# Altium PCB Kanaloa_v2.0.0_Power.PcbDoc (part 2 of 2)
Units mil, origin at the board's own origin, x right, y up, seen from the top; angles counter-clockwise.
Board outline 5000 x 6000 mil, 4 copper layers (Top Layer, GND, +24V, Bottom Layer), stack 62 mil thick; 146 components, 108 nets, 614 pads, 645 vias.
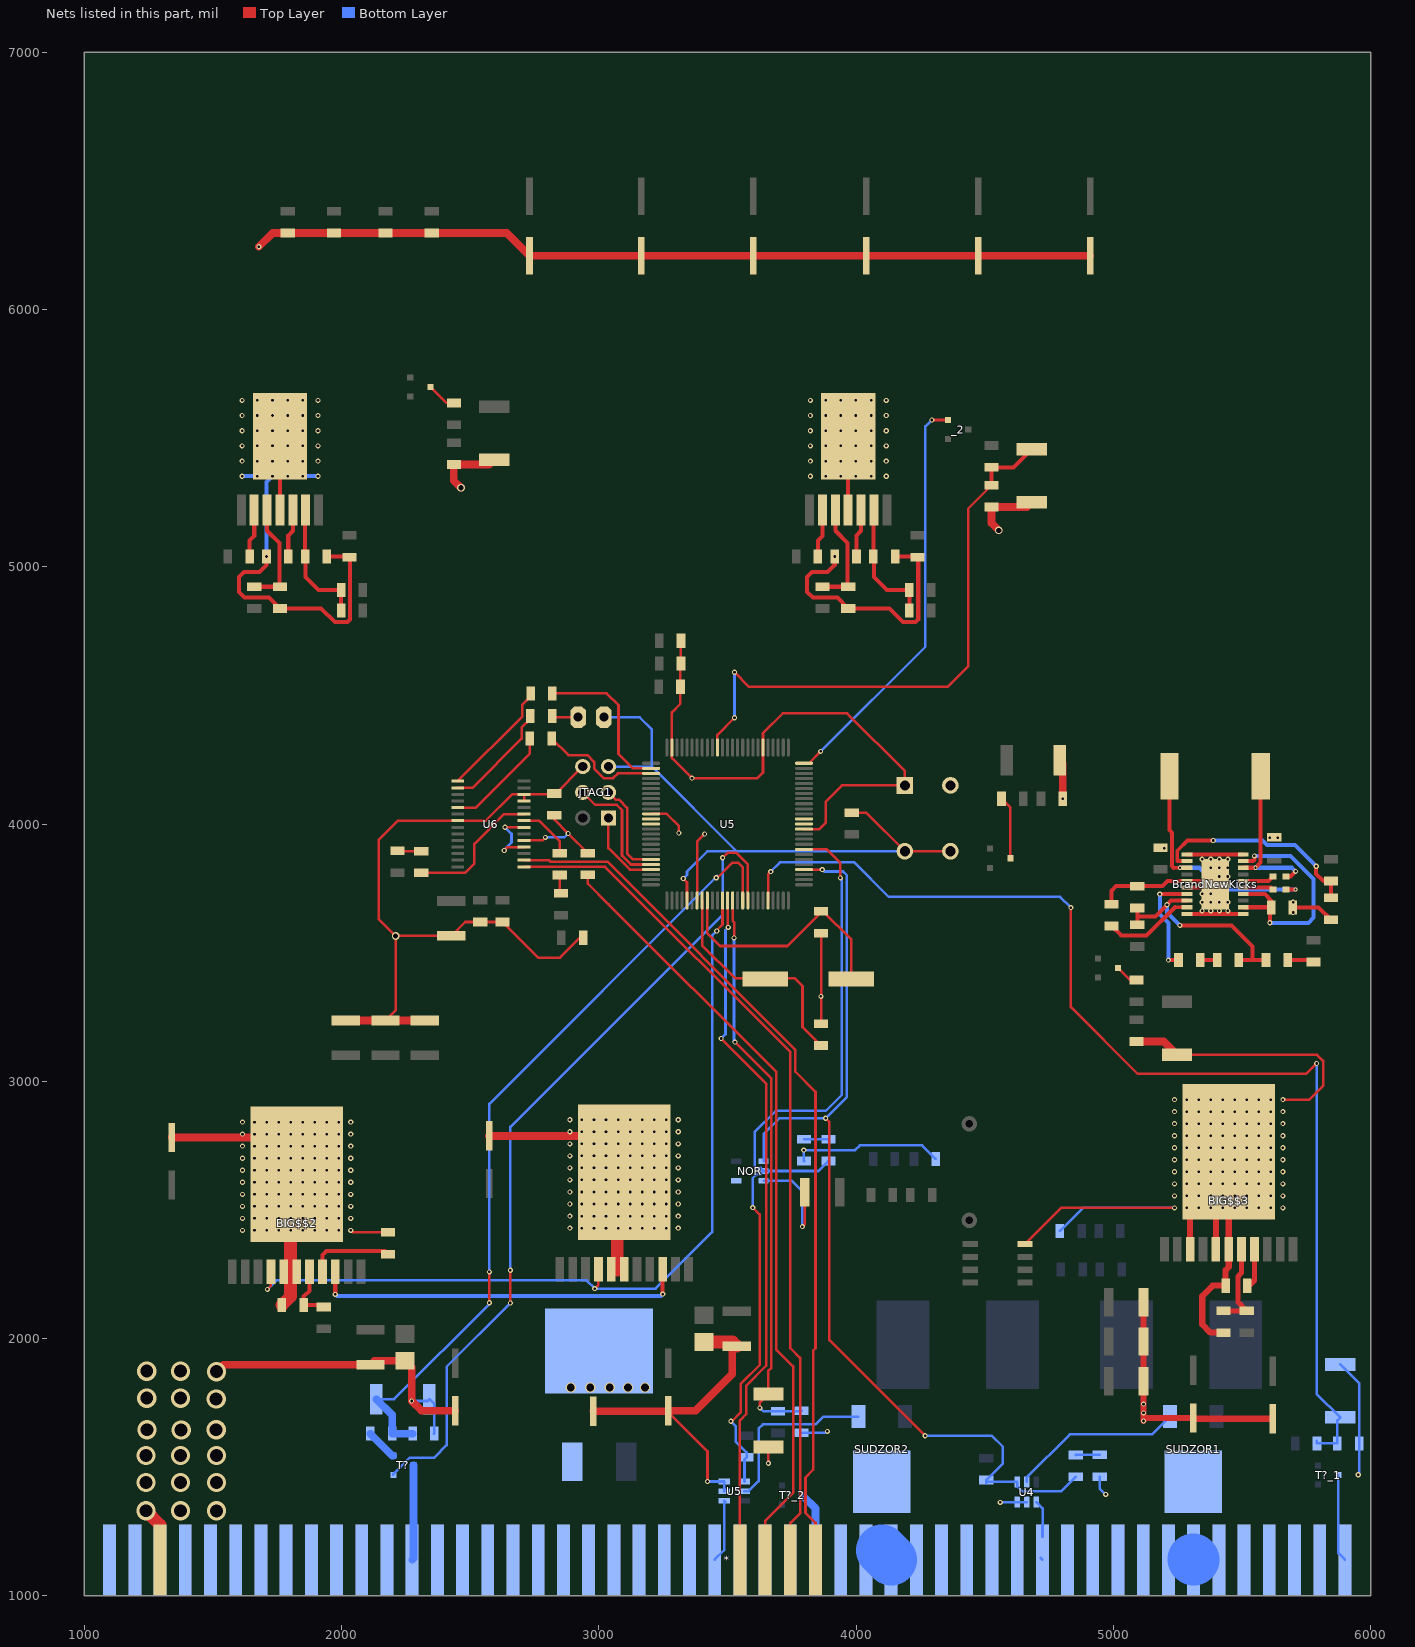
[diagram p4: the nets of this part, all layers, seen from the top]

## Via types
v1: diameter 20, hole 10, Top Layer to Bottom Layer, 535 vias
v2: diameter 75, hole 50, Top Layer to Bottom Layer, 89 vias
v3: diameter 30, hole 20, Top Layer to Bottom Layer, 6 vias
v4: diameter 40, hole 30, Top Layer to Bottom Layer, 5 vias
v5: diameter 22, hole 10, Top Layer to Bottom Layer, 3 vias
v6: diameter 80, hole 60, Top Layer to Bottom Layer, 3 vias
v7: diameter 15.75, hole 7.87, Top Layer to Bottom Layer, 3 vias
v8: diameter 10, hole 10, Top Layer to Bottom Layer, 1 vias

## Nets (pads, with @x,y where several pads share a name; then routed paths per layer and width w, separated by ;. In a path a pad name is that pad's centre, name@x,y a point inside that pad or via, vN(x,y) a via of type N, cw(c..) or ccw(c..) an arc to the next point about the centre after c; other vN are vias at no path point) (continued)
battery1monitor: _1_1.1 U5.46 Z2_1_1.N | length 4447.3
  Top Layer w10: U5.46@3657.48,3702.76 3657.48,3804.48 v1(3668,3815) ; v1(4835,3675) 4835,3288 5094.72,3028.28 5749.28,3028.28 v1(5790,3069)
  Bottom Layer w10: v1(3668,3815) 3704,3851 3992.72,3851 4126.72,3717 4793,3717 v1(4835,3675) ; v1(5790,3069) 5790,1785 Z2_1_1.N@5882,1693 5870.68,1681.68 _1_1.1@5870.68,1592 _1_1.1@5791.32,1592 _1_1.1@5791.32,1602.32
battery2monitor: _1_2.2 _1_3.2 U5.39 Z2_1_2.N | length 2221.7
  Top Layer w10: U5.39@3519.68,3702.76 3519.68,3624.32 3526,3618 3526,3558 v1(3525,3557) ; v1(3529,3152) 3670,3011 3670,1885.72 3659,1874.72 Z2_1_2.N@3659,1784 3626,1751 v1(3626,1730)
  Bottom Layer w10: v1(3525,3557) 3525,3156 v1(3529,3152) ; v1(3626,1730) 3638.68,1717.32 _1_3.2@3696,1717.32 3787,1717.32 _1_2.2@3788,1718.32
"BATTERY 1": *.88 *.89 *.90 *.91 *.92 *.93 *.94 *.95 *.96 *.97 *.98 *.99 *.100 SUDZOR1.D T?_1.C U4.1 | length 539.8
  Bottom Layer w10: U4.1@4700.4,1363.63 4725,1339.03 4725,1230 4724,1229 *.88@4724,1272.06 ; *.88@4717.52,1146.48 *.88@4724,1140 ; T?_1.C@5874.37,1469 5874.37,1165.63 *.100@5900,1140
  Bottom Layer w200: *.94@5310.04,1141.96 *.94@5312,1140
"BATTERY 1 STATUS": Bat1Stat.2 NOR.13 R9.1@4505.91,1449.8 U4.4 U5.54 | length 3809.1
  Top Layer w10: U5.54@3797.24,3822.83 v1(3868.11,3822.83) ; v1(3881,2856) 3896,2841 3896,1994 v1(4268,1622)
  Bottom Layer w10: NOR.13@3640.15,2688.4 3640.15,2795.15 3701,2856 v1(3881,2856) 3963.98,2938.98 3963.98,3800.71 3949.33,3815.35 3875.59,3815.35 v1(3868.11,3822.83) ; v1(4268,1622) 4527,1622 4570,1579 4570,1513.9 R9.1@4505.91,1449.8 ; R9.1@4505.91,1437.01 R9.1@4505.91,1449.8 ; Bat1Stat.2@4853.35,1462.23 4796.83,1405.72 4645.96,1405.72 4625.6,1426.08 U4.4@4625.6,1442.37 4513.34,1442.37 R9.1@4505.91,1449.8
"BATTERY 2": *.75 *.76 *.77 *.78 *.79 *.80 *.81 *.82 *.83 *.84 *.85 *.86 *.87 SUDZOR2.D T?_2.C U5.1@3487.2,1369.09 | length 575.5
  Bottom Layer w10: *.75@3450,1140 3487.2,1177.2 U5.1@3487.2,1369.09 U5.1@3492.03,1364.27
  Bottom Layer w30: T?_2.C@3790.37,1391 3842,1339.37 *.79@3842,1140
  Bottom Layer w200: 4099.41,1176.59 *.82@4136,1140
"BATTERY 2 STATUS": Bat2Stat.2 NOR.12 R10.1 U5.4@3565.94,1443.9 U5.58 | length 3229.5
  Top Layer w10: v1(3513,1678) 3516.36,1678 3552,1713.64 3552,1824.29 3625.55,1897.84 3625.55,2139.02 3625,2139.57 3625,2482 v1(3598,2509) ; U5.58@3797.24,3901.57 3885.83,3901.57 3938.98,3848.43 v1(3938.98,3790.35)
  Bottom Layer w10: v1(3513,1678) 3531.44,1659.56 3531.44,1599.38 3574,1556.82 R10.1@3574,1537.68 3565.94,1529.62 U5.4@3565.94,1443.9 ; v1(3598,2509) 3598,2623.17 3614.25,2639.43 3628.57,2639.43 NOR.12@3640.15,2651 ; Bat2Stat.2@3891.97,2689.94 3853.03,2651 NOR.12@3640.15,2651 ; v1(3938.98,3790.35) 3943.98,3785.35 3943.98,2947.26 3881.72,2885 3687.46,2885 3605.46,2803 3605.46,2671.36 3614.25,2662.57 3628.57,2662.57 NOR.12@3640.15,2651
BST1: .1uF.2@5619.95,3795.92 BrandNewKicks.16 | length 122.3
  Top Layer w15.75: BrandNewKicks.16@5504.8,3778.72 5602.75,3778.72 .1uF.2@5619.95,3795.92
BST2: .1uF.2@5619.95,3745.92 BrandNewKicks.15 | length 118.1
  Top Layer w15.75: BrandNewKicks.15@5504.8,3753.13 5612.75,3753.13 .1uF.2@5619.95,3745.92
Collector_12: ?.1@2436.02,5636.81 ?.C@2345.37,5699 | length 116.4
  Top Layer w10: ?.C@2345.37,5699 2407.56,5636.81 ?.1@2436.02,5636.81
Collector_24Reg: ?.2@5089.83,3393.68 ?.C@5018.37,3440 | length 90.7
  Top Layer w10: ?.C@5018.37,3440 5064.69,3393.68 ?.2@5089.83,3393.68
Collector_24V: ?.2@4564.98,4098.31 ?.C@4599.37,3867 | length 245.6
  Top Layer w10: ?.2@4564.98,4098.31 4599.37,4063.93 ?.C@4599.37,3867
collector_disp: 
disp_sel: _2.B U5.75 | length 1613.6
  Top Layer w10: U5.75@3797.24,4236.22 3816.22,4236.22 v1(3862,4282) ; v1(4294.37,5570.6) _2.B@4356.6,5570.6
  Bottom Layer w10: v1(3862,4282) 4269,4689 4269,5545.23 v1(4294.37,5570.6)
dispmon: _2.1@4526.39,5316.88 _2.2@4526.39,5386.76 U5.90 Z3_1.N | length 2282.3
  Top Layer w10: U5.90@3460.63,4297.24 3460.63,4346.63 v1(3527,4413) ; v1(3527,4590) 3584,4533 4355,4533 4435,4613 4435,5225.49 _2.1@4526.39,5316.88
  Top Layer w15.75: _2.1@4526.39,5316.88 _2.2@4526.39,5386.76 4612.37,5386.76 Z3_1.N@4682.89,5457.28
  Bottom Layer w10: v1(3527,4413) v1(3527,4590)
EN12: ENB.2 ENT.1 pad.2@1710,5220 | length 418.4
  Top Layer w15.75: ENT.1@1660,4922.32 ENB.2@1760,4922.32 1757.72,4924.61 1757.72,5092.28 1710,5140 pad.2@1710,5220
EN12_disp: ENB_1.2 ENT_1.1 pad.2@3919,5220 | length 415.2
  Top Layer w15.75: ENT_1.1@3869,4922.32 ENB_1.2@3969,4922.32 ; pad.2@3919,5220 3919,5140 3966.72,5092.28 ENB_1.2@3966.72,4924.61
Enable: BIG$$2.3 pad.3@2997.95,2268.86 U5.37 | length 3308.5
  Top Layer w10: v1(1711,2191) 1725,2205 BIG$$2.3@1725,2259.72 ; v1(2984,2194) 2997.95,2207.95 pad.3@2997.95,2268.86 ; v1(3458,3584) 3458,3587 3480.32,3609.32 U5.37@3480.32,3702.76
  Bottom Layer w10: v1(1711,2191) 1746,2226 2952,2226 v1(2984,2194) 3220,2194 3440,2414 3440,3566 v1(3458,3584)
"EXT. PWR": *.62 *.63 *.64 *.65 *.66 *.67 *.68 *.69 *.70 *.71 *.72 *.73 *.74 ?.2@2896,1521 T?.C | length 369.2
  Bottom Layer w30: *.63@2274,1140 2279.37,1145.37 T?.C@2279.37,1507
"EXT. PWR. STATUS": NOR.11
externalPowerVoltageMon: _1.1 U5.41 Z2_1.N | length 3125.9
  Top Layer w10: v1(2574,2139) v1(2574,2259) ; v1(3456,3791) 3460.64,3791 3519.64,3850 3540.36,3850 3559.37,3830.99 3559.37,3780.94 ; U5.41@3559.06,3702.76 3559.06,3780.94
  Bottom Layer w10: Z2_1.N@2135,1764 2204,1764 2574,2134 v1(2574,2139) ; v1(2574,2259) 2574,2912 v1@3460,3798
  Bottom Layer w30: Z2_1.N@2135,1764 2196.32,1702.68 _1.1@2196.32,1630 _1.1@2275.68,1630
extpower_emit: _1.2@2111.68,1630 T?.E | length 124.4
  Bottom Layer w30: _1.2@2111.68,1630 2197.28,1544.4 T?.E@2200.63,1544.4
ExtpwrVoltageSel: T?.B U5.42 | length 3250.3
  Top Layer w10: v1(2656,2138) v1(2656,2265) ; v1(3481,3869) 3500,3888 3534,3888 3578.74,3843.26 U5.42@3578.74,3702.76
  Bottom Layer w10: T?.B@2200.63,1469.6 2200.63,1473.1 2264.53,1537 2360,1537 2408,1585 2408,1890 v1(2656,2138) ; v1(2656,2265) 2656,2822 3481,3647 v1(3481,3869)
FB: 1M.1 10k.2@5593.22,3470.69 43.2k.2 3300pF.1 BrandNewKicks.8 | length 859.3
  Top Layer w15: 5224.4,3701.94 BrandNewKicks.8@5286.29,3701.94
  Top Layer w15.75: 1M.1@5092.94,3608.24 5092.94,3640.92 ; 43.2k.2@5092.94,3673.6 5092.94,3640.92 ; 5224.4,3701.94 v1(5208.38,3685.92) 5163.38,3640.92 5092.94,3640.92 ; v1(5258.38,3605.92) 5458.38,3605.92 5540.54,3523.76 5540.54,3470.69 ; 3300pF.1@5487.87,3470.69 5540.54,3470.69 ; 10k.2@5593.22,3470.69 5540.54,3470.69
  Bottom Layer w15.75: v1(5208.38,3685.92) 5208.38,3655.92 v1(5258.38,3605.92)
FB3: BIG$$3.6 RFBB.2@5428.41,2107.54 RFBT.1@5518.41,2107.54 | length 349.8
  Top Layer w19.68: RFBB.2@5428.41,2107.54 RFBT.1@5518.41,2107.54 5484.16,2141.79 5484.16,2240.99 5498.41,2255.25 BIG$$3.6@5498.41,2347.26
FB5: BIG$$2.6 RFBB.1@1852.32,2130 RFBT.2@1930,2122.32 | length 220
  Top Layer w15.75: BIG$$2.6@1875,2259.72 1875,2185 1852.32,2162.32 RFBB.1@1852.32,2130 1922.32,2130 RFBT.2@1930,2122.32
FB12: CFF.2 pad.5@1860,5220 RFBB12.1 RFBT12.2 | length 500.3
  Top Layer w15.75: pad.5@1860,5220 1857.68,5217.68 RFBB12.1@1857.68,5040 1860,5037.68 1860,4960 1910,4910 CFF.2@1997.68,4910 RFBT12.2@1997.68,4830
FB12_disp: CFF_1.2 pad.5@4069,5220 RFBB12_1.1 RFBT12_1.2 | length 493.7
  Top Layer w15.75: RFBB12_1.1@4066.68,5040 pad.5@4066.68,5217.68 ; RFBB12_1.1@4069,5037.68 4069,4960 4119,4910 CFF_1.2@4206.68,4910 RFBT12_1.2@4206.68,4830
ff: 10k.1@5677.87,3470.69 22pF.1 | length 103.4
  Top Layer w15.75: 10k.1@5677.87,3470.69 5771.29,3470.69 22pF.1@5778.38,3463.6
Gate1: SUDZOR1.G U4.5 | length 671.3
  Bottom Layer w10: U4.5@4663,1442.37 4663,1458.66 4831.34,1627 5149.99,1627 SUDZOR1.G@5219.49,1696.5
Gate2: SUDZOR2.G U5.5@3565.94,1406.5 | length 682.6
  Bottom Layer w10: U5.5@3565.94,1406.5 3582.24,1406.5 3621,1445.26 3621,1649.44 3637.56,1666 3841.74,1666 3872.24,1696.5 SUDZOR2.G@4008.86,1696.5
GND: 4.7uF.2 10uF.1@5625.54,3948.24 10uF.2@5182.94,3908.24 35.7K.1 43.2k.1 130k.2 *.3 *.51 *.52 *.53 *.54 *.55 *.56 *.57 *.58 *.59 *.60 *.61 ?.1@4189.42,4149.95 ?.1@4803.17,4098.31 ?.2@2436.02,5397.64 ?.2@5089.83,3154.5 ?.3@4366.58,4149.95 ?.4@4656.3,2367 ?.GND _1.2@2360.32,1630 _1_1.2@5955.32,1592 _1_2.1 _2.2@4526.39,5232.24 BIG$$2.4 BIG$$2.5 BIG$$2.11 BIG$$3.2 BIG$$3.4 BIG$$3.5 BIG$$3.11 BrandNewKicks.1 BrandNewKicks.5 BrandNewKicks.6 BrandNewKicks.10 BrandNewKicks.11 BrandNewKicks.20 BrandNewKicks.21 C1.1 C2.1 C3.1 C5.2 C6.1 C7.1 C8.1 C9.1 C10.1 C17.N C18.N C19.N C20.N C21.N C22.N C23.2 C24.2 C25.2 C26.2 CinB1.2 CinB1_1.1 CinB2.2 CinB2_1.1 CinB3.2 CinB3_1.1 CinMByp.N CinSlByp.N Cout.2 Cout_1.2 CoutB1.N CoutB1_1.N CoutB2.N CoutB2_1.N CoutB3.N CoutMByp1.1 CoutMByp2.1 CoutPwrP.2 CoutSlByp1.1 CoutSlByp2.1 CSS12.2 CSS12_1.2 CSS.1 ENB.1 ENB_1.1 JTAG1.6 NOR.14 pad.3@1760,5220 pad.3@3969,5220 pad.4@3047.95,2268.86 pad.5@3097.95,2268.86 pad.7@1760,5507.6 pad.7@3969,5507.6 pad.11 R8.1 R11.2 R12.2 R14.2 R14_1.2 RFBB12.2 RFBB12_1.2 RFBB.1@5428.41,2022.89 RFBB.2@1767.68,2130 U4.2 U4.3 U5.2@3487.2,1406.5 U5.3@3487.2,1443.9 U5.11 U5.32 U5.62 U5.81 U5.99 U6.7 U6.18 U6.21 U6.25 U6.26 Z1.P Z2.P Z2_1.P Z2_1_1.P Z2_1_2.P Z3.P Z3_1.P | length 25800.2
  Top Layer w10: v1(2035.47,2419.95) 2043.09,2412.32 CSS.1@2180,2412.32 ; CinB2.2@2170.28,3236.22 2209.65,3275.59 v3(2209.65,3564.96) ; v1(2632,3897) 2645.43,3910.43 U6.18@2708.94,3910.43 ; v1(2634.8,3987.2) U6.21@2708.94,3987.2 ; U6.25@2708.94,4089.57 U6.26@2708.94,4115.16 ; JTAG1.6@2937.01,4223.03 2829.13,4115.16 U6.26@2708.94,4115.16 ; C5.2@2938.23,3570 2848.54,3480.32 2763.78,3480.32 C7.1@2625,3619.09 C9.1@2538.39,3619.09 2480.32,3619.09 C10.1@2426.18,3564.96 v3(2209.65,3564.96) ; U5.11@3202.76,4039.37 3263.63,4039.37 3311,3992 v1(3311,3965) ; CoutB3.N@3266.73,1716.54 3422.1,1561.17 v1(3422.1,1443.9) ; C1.1@3318.9,4712.6 C2.1@3318.9,4624.02 3316.93,4622.05 C3.1@3316.93,4533.46 3316.93,4467.52 3283.46,4434.06 U5.99@3283.46,4297.24 3283.46,4256.63 v1(3361.95,4178.15) 3616.14,4178.15 3637.8,4199.8 U5.81@3637.8,4297.24 3637.8,4353.35 3714.57,4430.12 3964.57,4430.12 4189.42,4205.27 ?.1@4189.42,4149.95 3944.95,4149.95 3882,4087 3882,4005.32 3857,3980.32 U5.62@3797.24,3980.32 ; U5.32@3381.89,3702.76 3381.89,3931.89 v1(3411,3961) ; v1(3659,1515) Z2_1_2.P@3659,1578 ; v1(3791,2435) 3800.09,2444.09 CoutPwrP.2@3800.09,2568 ; C6.1@3863.47,3223.39 C8.1@3863.47,3575.76 ; ?.4@4656.3,2367 4796.78,2507.49 v1(5237.68,2507.49) ; Z1.P@5247.31,3102.68 5791.67,3102.68 5815,3079.36 5815,2982 5761.69,2928.69 v1(5658.88,2928.69) ; v3(2209.65,3564.96) 2143.7,3630.91 2143.7,3937.99 2218.5,4012.8 U6.7@2451.06,4012.8 2560.04,4012.8 2662.4,4115.16 U6.26@2708.94,4115.16
  Top Layer w15.75: v1(1707.68,5040) 1707.68,5007.68 1680,4980 1620,4980 1600,4960 1600,4902.6 1622.6,4880 1717.68,4880 ENB.1@1760,4837.68 1920.43,4837.68 1973.54,4784.57 2021.81,4784.57 2032.28,4795.04 2032.28,5035.39 Cout.2@2030,5037.68 2027.68,5040 RFBB12.2@1942.32,5040 ; pad.3@1760,5220 pad.7@1760,5507.6 ; v1(3916.68,5040) 3916.68,5007.68 3889,4980 3829,4980 3809,4960 3809,4902.6 3831.6,4880 3926.68,4880 ENB_1.1@3969,4837.68 4129.43,4837.68 4182.54,4784.57 4230.81,4784.57 4241.28,4795.04 Cout_1.2@4241.28,5035.39 ; pad.3@3969,5220 pad.7@3969,5507.6 ; RFBB12_1.2@4151.32,5040 Cout_1.2@4236.68,5040 ; 35.7K.1@4992.94,3688.24 4992.94,3740.49 5010.7,3758.24 43.2k.1@5092.94,3758.24 5190.7,3758.24 5211.02,3778.56 BrandNewKicks.5@5286.29,3778.56 ; BrandNewKicks.10@5286.29,3650.76 BrandNewKicks.11@5504.8,3650.76 ; BrandNewKicks.6@5286.29,3753.13 5335.58,3753.13 ; BrandNewKicks.5@5286.29,3778.72 5335.58,3778.72 ; BrandNewKicks.1@5286.29,3881.08 5323.22,3881.08 5323.38,3881.24 BrandNewKicks.20@5504.8,3881.24 ; 4.7uF.2@5697.87,3675.92 5797.98,3675.92 130k.2@5845.54,3628.36
  Top Layer w23.62: CinB1_1.1@5111.65,1839.13 CinB1_1.1@5117.13,1833.66 ; CinB3_1.1@5117.13,2140.75 CinB2_1.1@5117.13,1988.19 CinB1_1.1@5117.13,1833.66 ; BIG$$3.2@5298.41,2347.26 5298.41,2575.22 BIG$$3.11@5398.41,2675.22 ; BIG$$3.4@5398.41,2347.26 BIG$$3.11@5398.41,2675.22 ; RFBB.1@5428.41,2022.89 5377.07,2022.89 5345.28,2054.69 5345.28,2164.69 5385.81,2205.22 CSS.1@5436.09,2205.22 5436.09,2265.5 5448.41,2277.82 BIG$$3.5@5448.41,2347.26 BIG$$3.11@5448.41,2725.22 BIG$$3.11@5398.41,2675.22 ; CoutB2_1.N@5620.08,1687.99 5312.99,1687.99 CoutB1_1.N@5310.04,1690.94 5128.94,1690.94 v1(5117.13,1679.13) CinB1_1.1@5117.13,1833.66
  Top Layer w30: *.3@1294,1140 *.3@1294,1275 ; CinMByp.N@1339.57,2781.5 1681.18,2781.5 BIG$$2.11@1825,2637.68 ; v2(1513,1871) 1539.64,1897.64 CoutMByp1.1@2112.2,1897.64 2127.95,1913.39 CoutMByp2.1@2246.06,1913.39 2272,1887.45 v1(2272,1757) 2310.5,1718.5 CoutB1.N@2441.93,1718.5 ; v1(1678,6244) 1731.68,6297.68 C23.2@1790,6297.68 C24.2@1970,6297.68 C25.2@2170,6297.68 C26.2@2350,6297.68 2641.18,6297.68 C17.N@2730,6208.86 C18.N@3165,6208.86 C19.N@3600,6208.86 C20.N@4040,6208.86 C21.N@4475,6208.86 C22.N@4910,6208.86 ; CinB1.2@2015.75,3236.22 CinB2.2@2170.28,3236.22 CinB3.2@2322.83,3236.22 ; v3(2464,5307) 2436.02,5334.98 ?.2@2436.02,5397.64 2573.47,5397.64 Z3.P@2592.52,5416.69 ; CinSlByp.N@2572.83,2787.4 2957.36,2787.4 pad.11@3097.95,2646.81 ; CoutB2.N@2978.35,1716.54 3266.73,1716.54 CoutB3.N@3268.7,1718.5 3375.5,1718.5 3518.7,1861.7 CoutSlByp1.1@3518.7,1986.22 ; v3(4554.37,5141.6) 4526.39,5169.57 _2.2@4526.39,5232.24 4663.84,5232.24 Z3_1.P@4682.89,5251.28 ; v1(4803.17,4098.31) Z2.P@4803.17,4235.76 ; ?.2@5089.83,3154.5 5195.5,3154.5 Z1.P@5247.31,3102.68
  Top Layer w50: v2(1239,1330) *.3@1294,1275 ; RFBB.2@1767.68,2130 1800.59,2162.91 1800.59,2613.27 BIG$$2.11@1825,2637.68 ; 3071,2266 pad.11@3071,2425.66 ; CoutSlByp2.1@3408.46,1986.22 3518.7,1986.22 CoutSlByp1.1@3535.43,1969.49
  Bottom Layer w10: v2(1513,1871) v2@1514,1871 ; v1(2272,1757) 2334,1757 Z2_1.P@2341,1764 2360.32,1744.68 _1.2@2360.32,1630 _1.2@2357.53,1630 ; v1(2632,3897) 2632,3900.5 2660,3928.5 2660,3962 v1(2634.8,3987.2) ; v1(3422.1,1443.9) U5.3@3487.2,1443.9 U5.2@3487.2,1406.5 ; NOR.14@3640.15,2613.6 3749.4,2613.6 3791,2572 v1(3791,2435) ; _1_2.1@3788,1633.68 3882.68,1633.68 v1(3888,1639) ; R11.2@3797.48,2689.94 3796,2691.42 v1(3796,2732.26) 3996.26,2732.26 4015,2751 4256.32,2751 R14_1.2@4309.32,2698 ; v1(4560,1363) 4560.63,1363.63 U4.3@4625.6,1363.63 U4.2@4663,1363.63 ; R14.2@4791.68,2418 4881.16,2507.49 v1(5237.68,2507.49) ; R12.2@4946.85,1462.6 4946.85,1417.15 v1(4970,1394) ; Z2_1_1.P@5882,1899 5956,1825 5956,1474 v1(5952,1470)
  Bottom Layer w15.75: v1(1613,5352) v1(1672,5352) v1(1731,5352) ; v1(1707.68,5040) 1707.68,5328.68 v1(1731,5352) ; v1(1908,5352) v1(1849,5352) v1(1790,5352) v1(1731,5352)
  other v1: 5117.13,1710.63 5117.13,1745.08 1614.27,2419.95 1614.27,2419.95 1614.27,2419.95 1614.27,2419.95 1661.07,2419.95 1661.07,2419.95 1707.87,2419.95 1707.87,2419.95 1754.67,2419.95 1754.67,2419.95 1801.47,2419.95 1801.47,2419.95 1848.27,2419.95 1848.27,2419.95 1895.07,2419.95 1895.07,2419.95 1941.87,2419.95 1941.87,2419.95 1988.67,2419.95 1988.67,2419.95 2035.47,2419.95 2887.22,2429.08 2934.02,2429.08 2980.82,2429.08 3027.62,2429.08 3074.42,2429.08 3121.22,2429.08 3168.02,2429.08 3214.82,2429.08 3261.62,2429.08 3308.42,2429.08 1614.27,2466.75 1614.27,2466.75 1661.07,2466.75 1707.87,2466.75 1754.67,2466.75 1801.47,2466.75 1848.27,2466.75 1895.07,2466.75 1941.87,2466.75 1988.67,2466.75 2035.47,2466.75 2887.22,2475.88 2934.02,2475.88 2980.82,2475.88 3027.62,2475.88 3074.42,2475.88 3121.22,2475.88 3168.02,2475.88 3214.82,2475.88 3261.62,2475.88 3308.42,2475.88 5237.68,2507.49 5237.68,2507.49 5237.68,2507.49 5284.48,2507.49 5284.48,2507.49 5331.28,2507.49 5331.28,2507.49 5378.08,2507.49 5378.08,2507.49 5424.88,2507.49 5424.88,2507.49 5471.68,2507.49 5471.68,2507.49 5518.48,2507.49 5518.48,2507.49 5565.28,2507.49 5565.28,2507.49 5612.08,2507.49 5612.08,2507.49 5658.88,2507.49 5658.88,2507.49 1614.27,2513.55 1614.27,2513.55 1661.07,2513.55 1707.87,2513.55 1754.67,2513.55 1801.47,2513.55 1848.27,2513.55 1895.07,2513.55 1941.87,2513.55 1988.67,2513.55 2035.47,2513.55 2887.22,2522.68 2934.02,2522.68 2980.82,2522.68 3027.62,2522.68 3074.42,2522.68 3121.22,2522.68 3168.02,2522.68 3214.82,2522.68 3261.62,2522.68 3308.42,2522.68 5237.68,2554.29 5237.68,2554.29 5284.48,2554.29 5331.28,2554.29 5378.08,2554.29 5424.88,2554.29 5471.68,2554.29 5518.48,2554.29 5565.28,2554.29 5612.08,2554.29 5658.88,2554.29 1614.27,2560.35 1614.27,2560.35 1661.07,2560.35 1707.87,2560.35 1754.67,2560.35 1801.47,2560.35 1848.27,2560.35 1895.07,2560.35 1941.87,2560.35 1988.67,2560.35 2035.47,2560.35 2887.22,2569.48 2934.02,2569.48 2980.82,2569.48 3027.62,2569.48 3074.42,2569.48 3121.22,2569.48 3168.02,2569.48 3214.82,2569.48 3261.62,2569.48 3308.42,2569.48 5237.68,2601.09 5237.68,2601.09 5284.48,2601.09 5331.28,2601.09 5378.08,2601.09 5424.88,2601.09 5471.68,2601.09 5518.48,2601.09 5565.28,2601.09 5612.08,2601.09 5658.88,2601.09 1614.27,2607.15 1614.27,2607.15 1661.07,2607.15 1707.87,2607.15 1754.67,2607.15 1801.47,2607.15 1848.27,2607.15 1895.07,2607.15 1941.87,2607.15 1988.67,2607.15 2035.47,2607.15 2887.22,2616.28 2934.02,2616.28 2980.82,2616.28 3027.62,2616.28 3074.42,2616.28 3121.22,2616.28 3168.02,2616.28 3214.82,2616.28 3261.62,2616.28 3308.42,2616.28 5237.68,2647.89 5237.68,2647.89 5284.48,2647.89 5331.28,2647.89 5378.08,2647.89 5424.88,2647.89 5471.68,2647.89 5518.48,2647.89 5565.28,2647.89 5612.08,2647.89 5658.88,2647.89 1614.27,2653.95 1614.27,2653.95 1661.07,2653.95 1707.87,2653.95 1754.67,2653.95 1801.47,2653.95 1848.27,2653.95 1895.07,2653.95 1941.87,2653.95 1988.67,2653.95 2035.47,2653.95 2887.22,2663.08 2934.02,2663.08 2980.82,2663.08 3027.62,2663.08 3074.42,2663.08 3121.22,2663.08 3168.02,2663.08 3214.82,2663.08 3261.62,2663.08 3308.42,2663.08 5237.68,2694.69 5237.68,2694.69 5284.48,2694.69 5331.28,2694.69 5378.08,2694.69 5424.88,2694.69 5471.68,2694.69 5518.48,2694.69 5565.28,2694.69 5612.08,2694.69 5658.88,2694.69 1614.27,2700.75 1614.27,2700.75 1661.07,2700.75 1707.87,2700.75 1754.67,2700.75 1801.47,2700.75 1848.27,2700.75 1895.07,2700.75 1941.87,2700.75 1988.67,2700.75 2035.47,2700.75 2887.22,2709.88 2934.02,2709.88 2980.82,2709.88 3027.62,2709.88 3074.42,2709.88 3121.22,2709.88 3168.02,2709.88 3214.82,2709.88 3261.62,2709.88 3308.42,2709.88 5237.68,2741.49 5237.68,2741.49 5284.48,2741.49 5331.28,2741.49 5378.08,2741.49 5424.88,2741.49 5471.68,2741.49 5518.48,2741.49 5565.28,2741.49 5612.08,2741.49 5658.88,2741.49 1614.27,2747.55 1614.27,2747.55 1661.07,2747.55 1707.87,2747.55 1754.67,2747.55 1801.47,2747.55 1848.27,2747.55 1895.07,2747.55 1941.87,2747.55 1988.67,2747.55 2035.47,2747.55 2887.22,2756.68 2934.02,2756.68 2980.82,2756.68 3027.62,2756.68 3074.42,2756.68 3121.22,2756.68 3168.02,2756.68 3214.82,2756.68 3261.62,2756.68 3308.42,2756.68 5237.68,2788.29 5237.68,2788.29 5284.48,2788.29 5331.28,2788.29 5378.08,2788.29 5424.88,2788.29 5471.68,2788.29 5518.48,2788.29 5565.28,2788.29 5612.08,2788.29 5658.88,2788.29 1614.27,2794.35 1614.27,2794.35 1661.07,2794.35 1707.87,2794.35 1754.67,2794.35 1801.47,2794.35 1848.27,2794.35 1895.07,2794.35 1941.87,2794.35 1988.67,2794.35 2035.47,2794.35 2887.22,2803.48 2934.02,2803.48 2980.82,2803.48 3027.62,2803.48 3074.42,2803.48 3121.22,2803.48 3168.02,2803.48 3214.82,2803.48 3261.62,2803.48 3308.42,2803.48 5237.68,2835.09 5237.68,2835.09 5284.48,2835.09 5331.28,2835.09 5378.08,2835.09 5424.88,2835.09 5471.68,2835.09 5518.48,2835.09 5565.28,2835.09 5612.08,2835.09 5658.88,2835.09 1614.27,2841.15 1614.27,2841.15 1661.07,2841.15 1707.87,2841.15 1754.67,2841.15 1801.47,2841.15 1848.27,2841.15 1895.07,2841.15 1941.87,2841.15 1988.67,2841.15 2035.47,2841.15 2887.22,2850.28 2934.02,2850.28 2980.82,2850.28 3027.62,2850.28 3074.42,2850.28 3121.22,2850.28 3168.02,2850.28 3214.82,2850.28 3261.62,2850.28 3308.42,2850.28 5237.68,2881.89 5237.68,2881.89 5284.48,2881.89 5331.28,2881.89 5378.08,2881.89 5424.88,2881.89 5471.68,2881.89 5518.48,2881.89 5565.28,2881.89 5612.08,2881.89 5658.88,2881.89 5237.68,2928.69 5237.68,2928.69 5284.48,2928.69 5331.28,2928.69 5378.08,2928.69 5424.88,2928.69 5471.68,2928.69 5518.48,2928.69 5565.28,2928.69 5612.08,2928.69 3863,3330 5698.38,3655.92 5344.91,3662.06 5378.38,3662.06 5411.84,3662.06 5445.31,3662.06 5344.91,3695.53 5378.38,3695.53 5411.84,3695.53 5445.31,3695.53 5698.38,3695.92 5344.91,3728.99 5378.38,3728.99 5344.91,3762.46 5411.84,3795.92 5445.31,3795.92 5378.38,3829.39 5411.84,3829.39 5344.91,3862.85 5378.38,3862.85 5411.84,3862.85 5445.31,3862.85 5198.38,3905.92 5608.38,3945.92 5638.38,3945.92 3822,5352 3881,5352 3940,5352 3999,5352 4058,5352 4117,5352 1613,5411 1672,5411 1731,5411 1790,5411 1849,5411 1908,5411 3822,5411 3881,5411 3940,5411 3999,5411 4058,5411 4117,5411 1613,5470 1672,5470 1731,5470 1790,5470 1849,5470 1908,5470 3822,5470 3881,5470 3940,5470 3999,5470 4058,5470 4117,5470 1613,5529 1672,5529 1731,5529 1790,5529 1849,5529 1908,5529 3822,5529 3881,5529 3940,5529 3999,5529 4058,5529 4117,5529 1613,5588 1672,5588 1731,5588 1790,5588 1849,5588 1908,5588 3822,5588 3881,5588 3940,5588 3999,5588 4058,5588 4117,5588 1613,5647 1672,5647 1731,5647 1790,5647 1849,5647 1908,5647 3822,5647 3881,5647 3940,5647 3999,5647 4058,5647 4117,5647
  other v2: 1373,1330 1512.98,1329.76 1239,1440 1373,1440 1512.98,1439.76 1239,1545 1373,1545 1512.98,1544.76 1376,1644 1243,1645 1512,1645 1512,1765 1242,1768 1373,1768 1242,1873 1373,1873
  other v4: 2890,1809 2966,1809 3042,1809 3113,1809 3179,1809
  other v8: 5445.31,3829.39
MISO: JTAG1.1 U5.22 | length 317.3
  Top Layer w10: JTAG1.1@3037.01,4023.03 3037.01,3905.91 3120.08,3822.83 U5.22@3202.76,3822.83
MOSI: JTAG1.4 U5.21 | length 485.7
  Top Layer w10: JTAG1.4@2937.01,4123.03 2985.24,4074.8 3068.9,4074.8 3089.57,4054.13 3089.57,3876.97 3124.02,3842.52 U5.21@3202.76,3842.52
Net15uH_1: 15uH.1 .1uF.1@5671.13,3745.92 BrandNewKicks.3 | length 936.9
  Top Layer w15: 5234.4,3829.9 v7(5258.06,3829.9)
  Top Layer w15.75: 15uH.1@5218.38,4185.92 5218.38,3975.92 5228.38,3965.92 5228.38,3835.92 5234.4,3829.9 ; v7(5258.06,3829.9) BrandNewKicks.3@5286.29,3829.9 ; .1uF.1@5671.13,3745.92 v7(5708.38,3745.92)
  Bottom Layer w15.75: v7(5258.06,3829.9) 5334.4,3829.9 5418.38,3745.92 v7(5708.38,3745.92)
Net15uH_2: 15uH.2 .1uF.1@5671.13,3795.92 BrandNewKicks.18 | length 619.4
  Top Layer w15.75: BrandNewKicks.18@5504.8,3829.9 v7(5552.35,3829.9) 5572.71,3850.25 15uH.2@5572.71,4185.92 ; .1uF.1@5671.13,3795.92 5688.38,3795.92 v1(5708.38,3815.92)
  Bottom Layer w15.75: v7(5552.35,3829.9) 5694.4,3829.9 v1(5708.38,3815.92)
NetBIG$$1_0: 
NetC4_2: C4.2 U6.2 | length 429.7
  Top Layer w10: U6.2@2451.06,4140.75 2507.87,4140.75 2699.57,4332.44 2699.57,4375.24 2733.27,4408.94 C4.2@2733.27,4420.28
NetCfb_2: 10k.2@5337.87,3470.69 3300pF.2 | length 65.4
  Top Layer w15.75: 10k.2@5337.87,3470.69 3300pF.2@5403.22,3470.69
NetCSS_1: 
NetR4_2: R4.2 U6.1 | length 458.8
  Top Layer w10: U6.1@2451.06,4166.34 2701.54,4416.81 2701.54,4462.83 2734.25,4495.55 R4.2@2734.25,4507.87
NetR5_2: R5.2 U6.5 | length 426.3
  Top Layer w10: U6.5@2451.06,4063.98 2521.98,4063.98 2731.3,4273.3 R5.2@2731.3,4332.68
NetT1_1: Bat1Stat.1 R12.1 | length 93.7
  Bottom Layer w10: Bat1Stat.1@4853.35,1546.87 4853.72,1547.24 R12.1@4946.85,1547.24
NetT2_1: Bat2Stat.1 R11.1 | length 94.5
  Bottom Layer w10: R11.1@3797.48,2774.58 Bat2Stat.1@3891.97,2774.58
NetUC_RESET1_1: 
PD7: 
prejumpreset: ?.1@2919,4415 C4.1 | length 103.3
  Top Layer w10: C4.1@2817.91,4420.28 2823.19,4415 ?.1@2919,4415
PSon: *.26 U5.38 | length 2690.3
  Top Layer w10: v1(3475,3166) 3650,2991 3650,1894.01 3572,1816.01 3572,1705.36 3548,1681.36 *.26@3548,1140 ; U5.38@3500,3702.76 3500,3601 v1(3503,3598)
  Bottom Layer w10: v1(3475,3166) 3492,3183 3492,3587 v1(3503,3598)
PWM3: 
RESET: 1.1 ?.2@3019,4415 ?.2@4189.42,3894.05 ?.4@4366.58,3894.05 JTAG1.5 U5.30 | length 2435
  Top Layer w10: v1(3328,3788) 3342.52,3773.48 U5.30@3342.52,3702.76 ; 1.1@3983,4044.32 4039.14,4044.32 ?.2@4189.42,3894.05 ?.4@4366.58,3894.05
  Bottom Layer w10: ?.2@3019,4415 3158,4415 3206.1,4366.9 3206.1,4223.03 ; JTAG1.5@3037.01,4223.03 3206.1,4223.03 ; v1(3328,3788) 3342.52,3802.52 3342.52,3814.96 3421.61,3894.05 3535.09,3894.05 ; ?.2@4189.42,3894.05 3535.09,3894.05 ; 3206.1,4223.03 3535.09,3894.05
RESET#: R8.2 R9.1@2956.54,3886.67 U6.19 | length 383.6
  Top Layer w10: U6.19@2708.94,3936.02 2780.02,3936.02 v1(2792,3948) ; R8.2@2826.54,4034.02 2826.54,4016.67 v1(2880.2,3963) R9.1@2956.54,3886.67
  Bottom Layer w10: v1(2792,3948) 2865.2,3948 v1(2880.2,3963)
RLED: R7.1 RLED.2 | length 67.3
  Top Layer w10: RLED.2@2848.43,3804.13 2848.43,3738.19 R7.1@2849.41,3737.2
RON: pad.1@1660,5220 RoN.2 | length 187.3
  Top Layer w15.75: RoN.2@1642.32,5040 1642.32,5102.32 1660,5120 pad.1@1660,5220
RON_disp: pad.1@3869,5220 RoN_1.2 | length 187.3
  Top Layer w15.75: RoN_1.2@3851.32,5040 3851.32,5102.32 3869,5120 pad.1@3869,5220
RT: 35.7K.2 BrandNewKicks.9 | length 354.7
  Top Layer w15: 5238.81,3676.35 BrandNewKicks.9@5286.29,3676.35
  Top Layer w15.75: 35.7K.2@4992.94,3603.6 5030.62,3565.92 5128.38,3565.92 5238.81,3676.35
Run: 130k.1 953k.2 BrandNewKicks.2 | length 840.3
  Top Layer w15: 5248.34,3855.49 5248.34,3895.88 5288.38,3935.92 v1(5388.38,3935.92)
  Top Layer w15.75: 5248.34,3855.49 BrandNewKicks.2@5286.29,3855.49 ; v1(5788.38,3835.92) 5788.38,3805.92 5815.94,3778.36 953k.2@5845.54,3778.36 130k.1@5845.54,3713.01
  Bottom Layer w15.75: v1(5388.38,3935.92) 5578.96,3935.92 5596.83,3918.05 5706.25,3918.05 v1(5788.38,3835.92)
RX2: U5.12
RX3: U5.63
"RX LED": RLED.1 U6.22 | length 216.2
  Top Layer w10: U6.22@2708.94,4012.8 2767.72,4012.8 2848.43,3932.09 RLED.1@2848.43,3888.78
SCK: JTAG1.3 U5.20 | length 408.3
  Top Layer w10: JTAG1.3@3037.01,4123.03 3065.24,4094.8 3077.18,4094.8 3109.57,4062.42 3109.57,3885.25 3132.3,3862.52 ; 3163.03,3862.52 3132.3,3862.52 ; U5.20@3202.76,3862.2 3132.61,3862.2 3132.3,3862.52
SCL: 
SDA: 
SH5: BIG$$2.8 pad.8 | length 1463.6
  Top Layer w15.75: v1(1975,2171.26) BIG$$2.8@1975,2259.72 ; v1(3247.95,2172.32) pad.8@3247.95,2268.86
  Bottom Layer w15.75: v1(1975,2171.26) 1981.26,2165 3240.63,2165 v1(3247.95,2172.32)
SS3: BIG$$3.7 CSS.2@5520.73,2205.22 | length 158.3
  Top Layer w19.68: CSS.2@5520.73,2205.22 5528.82,2205.22 5548.41,2224.8 BIG$$3.7@5548.41,2347.26
SS5: BIG$$2.7 CSS.2@2180,2327.68 | length 331.6
  Top Layer w15.75: BIG$$2.7@1925,2259.72 1925,2325 1940,2340 2167.68,2340 CSS.2@2180,2327.68
SS12: CSS12.1 pad.4@1810,5220 | length 187.3
  Top Layer w15.75: CSS12.1@1792.32,5040 1792.32,5122.32 1810,5140 pad.4@1810,5220
SS12_disp: CSS12_1.1 pad.4@4019,5220 | length 187.3
  Top Layer w15.75: CSS12_1.1@4001.32,5040 4001.32,5122.32 4019,5140 pad.4@4019,5220
TLED: R6.1 TLED.2 | length 92.9
  Top Layer w10: R6.1@2216.54,3895.67 2217.52,3894.69 TLED.2@2309.06,3894.69
TX2: U5.13
TX3: U5.64
"TX LED": TLED.1 U6.23 | length 539.1
  Top Layer w10: TLED.1@2309.06,3810.04 2479.17,3810.04 2516,3846.87 2516,3923 2631.39,4038.39 U6.23@2708.94,4038.39
UC_RX: R4.1 U5.2@3202.76,4216.54 | length 615.3
  Top Layer w10: R4.1@2818.9,4507.87 3030.13,4507.87 3076,4462 3076,4272.85 3132.32,4216.54 U5.2@3202.76,4216.54
UC_TX: R5.1 U5.3@3202.76,4196.85 | length 473.5
  Top Layer w10: R5.1@2815.94,4332.68 2881.06,4267.56 2955.45,4267.56 2981.54,4241.48 2981.54,4215.53 3018.56,4178.5 3055.45,4178.5 3073.8,4196.85 U5.3@3202.76,4196.85
"USB DM": *.29 U6.16 | length 3407.2
  Top Layer w10: U6.16@2708.94,3859.25 2805.56,3859.25 2811.15,3853.66 3032.62,3853.66 3764,3122.28 3764,3036.92 3842,2958.92 3842,1962 3833,1953 3833,1489.64 3803,1459.64 3803,1322 3842,1283 *.29@3842,1140
"USB DP": *.28 U6.15 | length 3339.5
  Top Layer w10: U6.15@2708.94,3833.66 3024.34,3833.66 3744,3114 3744,1962 3782,1924 3782,1488.64 3783,1487.64 3783,1322 3744,1283 *.28@3744,1140
USB_5V: *.27 R9.2@2956.54,3802.02 | length 3037.9
  Top Layer w10: R9.2@2956.54,3802.02 2956.54,3768.46 3038,3687 3690,3035 3690,1956 3755,1891 3755,1400 3646,1291 *.27@3646,1140
VC: 10k.1@5253.22,3470.69 BrandNewKicks.7 | length 416.7
  Top Layer w15: v1(5179.99,3727.54) BrandNewKicks.7@5286.29,3727.54
  Top Layer w15.75: v1(5213.61,3470.69) 10k.1@5253.22,3470.69
  Bottom Layer w15.75: v1(5179.99,3727.54) 5180.5,3727.02 5180.5,3647.38 5213.61,3614.27 v1(5213.61,3470.69)
VCC: 
Vcc(): 4.7uF.1 BrandNewKicks.12 BrandNewKicks.14 BrandNewKicks.19 | length 971.5
  Top Layer w15.75: BrandNewKicks.12@5504.8,3676.35 4.7uF.1@5612.79,3676.35 ; BrandNewKicks.14@5504.8,3727.54 5588.46,3727.54 5612.79,3703.21 4.7uF.1@5612.79,3676.35 ; BrandNewKicks.19@5504.8,3855.49 5542.75,3855.49 5548.38,3861.12 v1(5548.38,3875.92) ; v1(5608.38,3615.92) 5608.38,3671.08 4.7uF.1@5613.22,3675.92 4.7uF.1@5612.79,3676.35
  Bottom Layer w15.75: v1(5548.38,3875.92) 5687.8,3875.92 5778.38,3785.34 5778.38,3635.92 5758.38,3615.92 v1(5608.38,3615.92)
Vin: 
Vout5: 
XTAL1: C6.2 U5.33 Y1.1 | length 888
  Top Layer w10: U5.33@3401.57,3702.76 3401.57,3528.54 3529.53,3400.59 3761,3400.59 3791.34,3370.25 3791.34,3210.63 C6.2@3861.22,3140.75
XTAL2: C8.2 U5.34 Y1.2 | length 963.5
  Top Layer w10: U5.34@3421.26,3702.76 3421.26,3575.12 3470.79,3525.59 3732.28,3525.59 3869.09,3662.4 3981.32,3550.17 Y1.2@3981.32,3398
pads on no net: *.23 *.24 *.25 *.30 *.31 *.32 *.33 *.34 *.35 *.36 *.37 *.38 *.44 *.45 _2.1@4526.39,5471.41 _2.C BIG$$2.2 BIG$$3.3 BIG$$3.8 JTAG1.2 U5.1@3202.76,4236.22 U5.4@3202.76,4177.17 U5.5@3202.76,4157.48 U5.6@3202.76,4137.8 U5.7 U5.8 U5.9 U5.14 U5.15 U5.16 U5.17 U5.18 U5.19 U5.23 U5.24 U5.25 U5.26 U5.27 U5.28 U5.29 U5.35 U5.36 U5.47 U5.48 U5.49 U5.50 U5.51 U5.52 U5.53 U5.55 U5.56 U5.57 U5.59 U5.60 U5.65 U5.66 U5.67 U5.68 U5.69 U5.70 U5.71 U5.76 U5.77 U5.78 U5.79 U5.82 U5.83 U5.84 U5.85 U5.86 U5.87 U5.88 U5.89 U5.94 U5.95 U5.96 U5.97 U5.98 U6.3 U6.6 U6.8 U6.9 U6.10 U6.11 U6.12 U6.13 U6.14 U6.24 U6.27 U6.28
copper on no net: | length 328.1
  Top Layer w10: 4356.6,5570.6 4357,5571 ; 4435.74,5533.6 4497.93,5471.41 4526.39,5471.41
  Top Layer w15.75: 3966.72,4924.61 3969,4922.32 ; 4066.68,5040 4069,5037.68 ; 4066.68,5217.68 4069,5220 ; 4216.68,5122.32 4239,5122.32 ; 4236.68,5040 4239,5037.68 4241.28,5035.39
  Top Layer w35.04: 3694.24,4896.65 3717.86,4920.28 3766.68,4969.09 ; 4119,5150 4119,5220

## Polygon pours and split planes (outlines as drawn)
GND on GND (split plane): 5979.9,1020.1 1020.1,1020.1 1020.1,6979.9 5979.9,6979.9
+24V on +24V (split plane): 5979.9,1020.1 1020.1,1020.1 1020.1,6979.9 5979.9,6979.9

## Other copper
Top Layer:
  rectangle net +5V: 3285.43,2056 3372,2315.94
  rectangle net +5V: 2515,1953.74 2816.93,2037.4
  rectangle net +5V: 2518,1001.36 3149.89,1274
  rectangle net +24V: 5188.98,2300.2 5246.06,2393.7
  rectangle net GND: 5384.84,2301.18 5454.72,2391.73
  rectangle net GND: 3042.32,2220.47 3099.41,2316.93
  rectangle net +5V: 3285.43,2223.43 3346.46,2315.94
  rectangle net +5V: 2009.84,2214.57 2088.58,2305.12
  rectangle net +24V: 1558.07,2212.6 1641.73,2307.09
  rectangle net +24V: 2831.69,2221.46 2914.37,2315.94
  rectangle net +3.3V: 5631.89,2300.2 5714.57,2394.69
  rectangle net GND: 5318.38,3637.97 5468.38,3893.87
  region net +24V: 5239,1002 5239,1297 5205,1331 4958,1331 4905,1384 4777,1384 4756,1363 4756,1310 4797,1269 4797,1003
  region net +24V: 2494,1000 2497,1003 2497,1639 2298,1639 2189,1748 2189,1853 1603,1853 1566,1816 1566,1288 1555,1277 1368,1277 1368,1000
  region net +5V: 2960,1140 2960,1278 2729,1509 2666,1446 2666,1140
Bottom Layer:
  rectangle net GND: 1169,1174 1580,1989
  rectangle net +24Pre: 4374,1805 4716,2511
  rectangle net +24Pre: 4374,1805 5151,2147
  rectangle net Batt2pre: 4080,1651 4283,2146
  rectangle net GND: 1074,1003 2097,1276
  rectangle net +24V: 4076,2793 4795,3692
  rectangle net "EXT. PWR": 2442,1177 3005,1604
  rectangle net "BATTERY 1": 5050,1154 5583,1569
  rectangle net "BATTERY 2": 3863,1112 4302,1568
  rectangle net Batt1pre: 5373,1652 5681,2124.05
  rectangle net "EXT. PWR": 2158.46,1002.95 3366.14,1275.59
  rectangle net "BATTERY 1": 4702.76,1002.95 5907.48,1275.59
  rectangle net "BATTERY 2": 3430.12,1001.97 4650.59,1275.59
  region net +24Pre: 3066,1445 3066,1754 3241,1754 3284,1797 3284,2186 3498,2400 3499,2399 3801,2399 3801,1767 3799,1765 3489,1765 3439,1715 3439,1516 3368,1445
  region net +24Pre: 3801,1767 3871,1767 3910,1806 4038,1806 4055,1823 4055,2157 4079,2181 4378,2181 4378,2507 4374,2511 4373,2510 3912,2510 3800,2398 3800,1766
+24V (plane layer: these items are gaps in the copper):
  pour cut-out: 2849,2921 3343,2921 3343,2394 2849,2394
  pour cut-out: 1576.05,2911.87 2070.05,2911.87 2070.05,2384.87 1576.05,2384.87
  pour cut-out: 5199.46,2999.4 5693.46,2999.4 5693.46,2472.4 5199.46,2472.4
  pour cut-out: 1574.78,5717.72 1940,5717.72 1940,5308 1574.78,5308

## Silkscreen, mask and mechanical layers (free items; w line width, h text height)
Top Overlay:
  drawing of 4321 lines, arcs and shapes, not listed
  text "USCAUV" at 5305.12,6765.75 h100
  text "Kanaloa" at 2734.25,6669.29 h200
  text "ka Makeha i Ka Lani" at 1763,5897 h200
  text "El Primo Retardo" at 1480,5740 h40

## Text inside footprints (layer, text, board x,y; h text height)
JTAG1: Top Overlay "1" at 3057.01,3943.03 h50 r90; Top Overlay "2" at 2957.01,3923.03 h50 r90; Top Overlay "5" at 3057.01,4283.03 h50 r90; Top Overlay "6" at 2957.01,4283.03 h50 r90